# EAGLE board micropov (EAGLE 5.10)
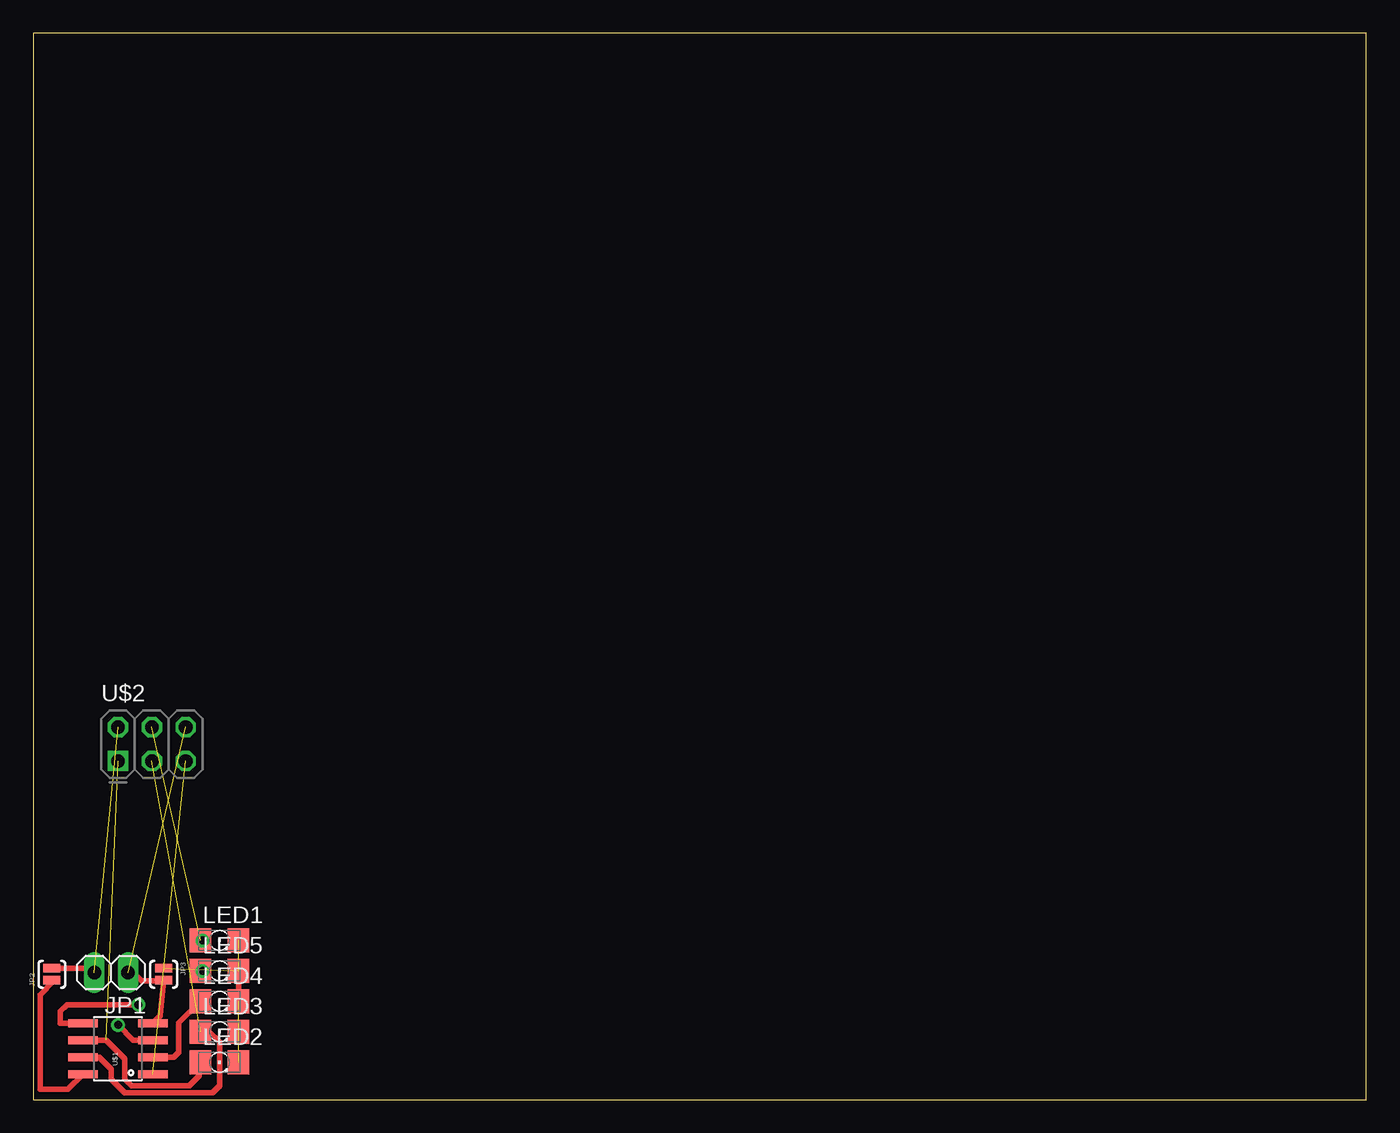
[diagram p0: board, top side]
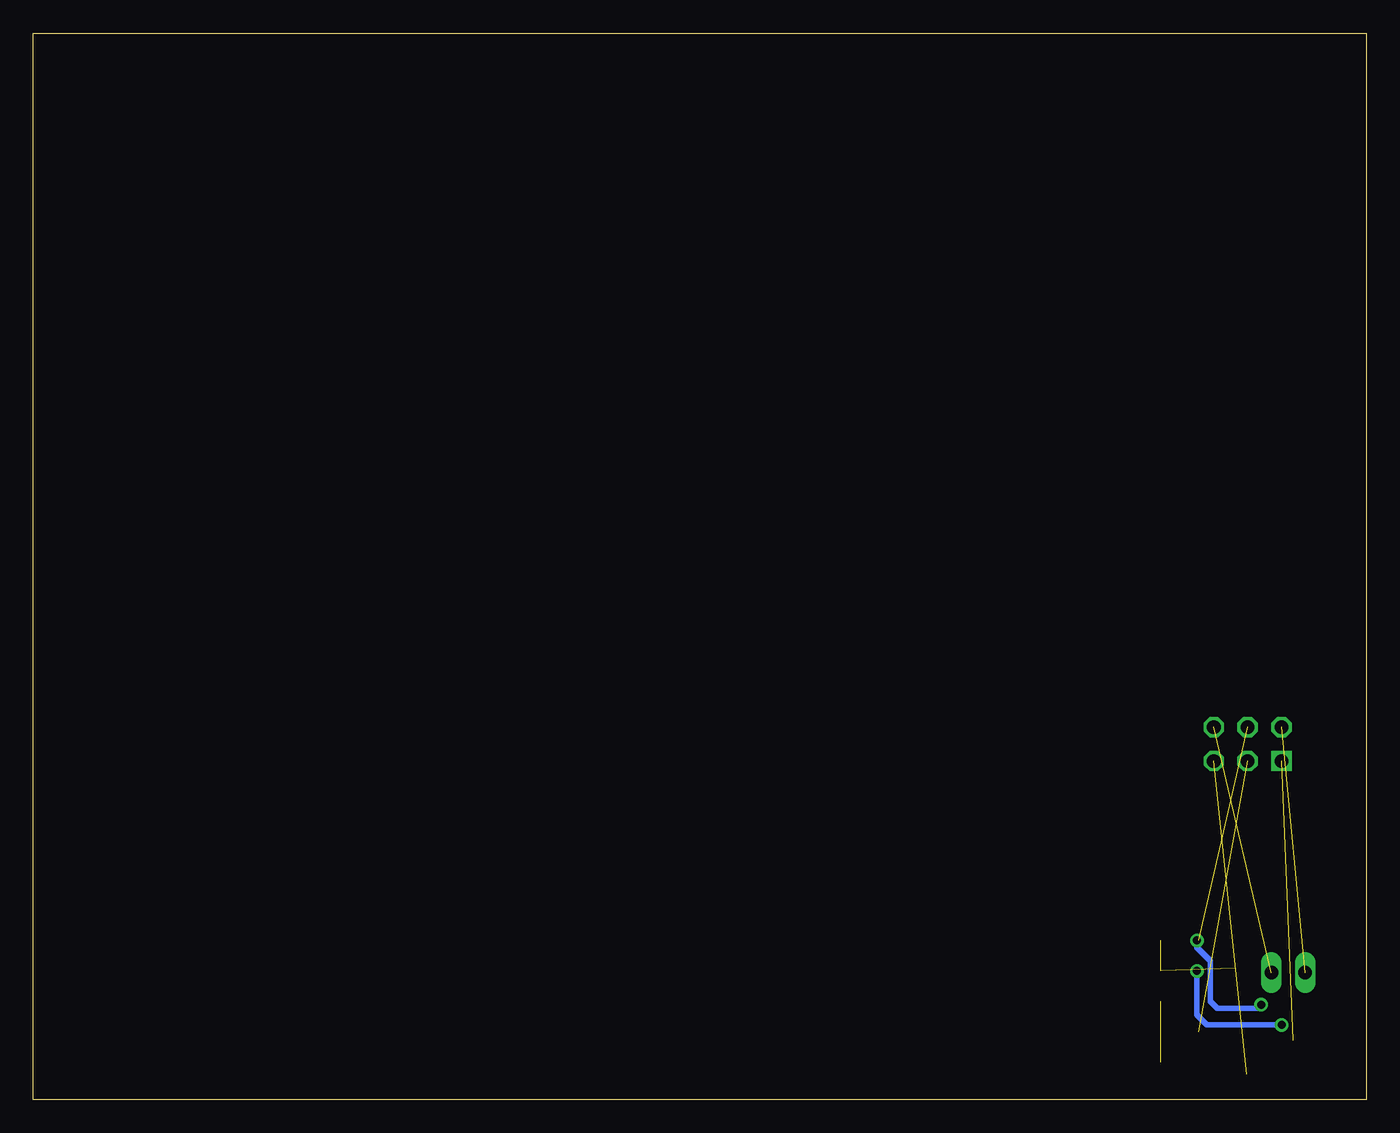
[diagram p1: board, bottom side, seen from below]

Size 100 x 80 mm. Coordinates in mm from the lower left corner, seen from the top.
Outline: 0,0 100,0 100,80 0,80 0,0
Copper layers (1*16): Top 0.035mm / dielectric 1.5mm / Bottom 0.035mm
Design rules "default": minimum track width 10mil, minimum drill 24mil, track to track 8mil, track to pad 8mil, pad to pad 8mil, via to via 8mil, smd to smd 8mil, copper to edge 40mil, drill to drill 8mil, minimum pad ring 10mil, minimum via ring 8mil, stop-mask expansion 4mil, vias tented up to drill 0mil, thermal gap 10mil

## Footprints (pad centres in the part's own frame; a part is rotated, then mirrored left to right if it is on the bottom)
1X02 = drill 1.016 long: 1 -1.27,0; 2 1.27,0
SJ_2S-NO = smd 0.635 x 1.27: 1 -0.45,0; 2 0.45,0
1206 = smd 1.6 x 1.803: A -1.422,0; C 1.422,0
SO08 = smd 0.61 x 2.21: 1 -1.905,-2.616; 2 -0.635,-2.616; 3 0.635,-2.616; 4 1.905,-2.616; 5 1.905,2.616; 6 0.635,2.616; 7 -0.635,2.616; 8 -1.905,2.616
2X3-NS = drill 1.016 square: 1 -2.54,-1.27 | drill 1.016 octagon: 2 -2.54,1.27; 3 0,-1.27; 4 0,1.27; 5 2.54,-1.27; 6 2.54,1.27

## Placement (x,y rotation side)
JP1  [1X02]  5.84,9.53 180 top
JP2  [SJ_2S-NO]  1.4,9.4 90 top
JP3  [SJ_2S-NO]  9.78,9.4 270 top
LED1  [1206]  13.97,11.94 0 top
LED2  [1206]  13.97,2.79 0 top
LED3  [1206]  13.97,5.08 0 top
LED4  [1206]  13.97,7.37 0 top
LED5  [1206]  13.97,9.65 0 top
U$1  ATTINY13SOIC  [SO08]  6.35,3.81 90 top
U$2  AVR_SPI_PRG_6NS  [2X3-NS]  8.89,26.67 0 top

## Library data of the parts
JP1 = pinhead
JP2 JP3 U$1 U$2 = SparkFun
LED1-LED5 = led

## Nets
GND: JP1.1 JP3.2 U$1.4 U$2.6
MISO: LED2.A U$1.6 U$2.1
MOSI: LED1.A U$1.5 U$2.4
N$4: LED4.A U$1.2
N$5: LED5.A U$1.3
N$6: JP3.1 LED1.C LED2.C LED3.C LED4.C LED5.C
N$10: JP2.1 U$1.8
RESET: U$1.1 U$2.5
SCK: LED3.A U$1.7 U$2.3
VCC: JP1.2 JP2.2 U$2.2

## Tracks (layer width: path | path; a pad name or v marks a point on that pad's centre or on a via)
GND  (1 unrouted)
  Top 0.406: U$1.4 9.53,6.27 JP3.2 9.72,8.89 8.13,8.89 7.49,9.53 JP1.1
MISO  (1 unrouted)
  Top 0.406: U$1.6 5.46,4.45 6.86,3.05 6.86,1.52 7.37,1.02 11.68,1.02 12.45,1.78 12.45,2.69 LED2.A
MOSI  (via drill 0.6)  (1 unrouted)
  Top 0.406: U$1.5 2.03,5.71 2.03,6.6 2.54,7.11 v7.87,7.11 | v12.7,11.94 LED1.A
  Bottom 0.406: v12.7,11.94 12.7,11.43 11.68,10.41 11.68,7.37 11.18,6.86 8.13,6.86 v7.87,7.11
N$4
  Top 0.406: U$1.2 10.54,3.17 10.92,3.56 10.92,5.74 LED4.A
N$5  (via drill 0.6)
  Top 0.406: U$1.3 7.49,4.45 v6.35,5.59 | v12.7,9.65 LED5.A
  Bottom 0.406: v6.35,5.59 11.94,5.59 12.7,6.35 12.7,9.5 LED5.A v12.7,9.65
N$6  (4 unrouted)
  Top 0.406: LED4.C LED5.C
N$10
  Top 0.406: JP2.1 1.52,8.89 0.51,7.87 0.51,0.76 2.59,0.76 U$1.8
RESET  (1 unrouted)
SCK  (1 unrouted)
  Top 0.406: U$1.7 4.95,3.17 5.84,2.29 5.84,1.52 6.86,0.51 13.46,0.51 13.97,1.02 13.97,4.32 13.21,5.08 LED3.A
VCC  (1 unrouted)
  Top 0.406: JP2.2 4.57,9.85 JP1.2